# Altium PCB STM32F4_.PcbDoc
Units mil, origin at the board's own origin, x right, y up, seen from the top; angles counter-clockwise.
Board outline 2080 x 3020 mil, 2 copper layers (Top Layer, Bottom Layer); 41 components, 98 nets, 279 pads, 38 vias.
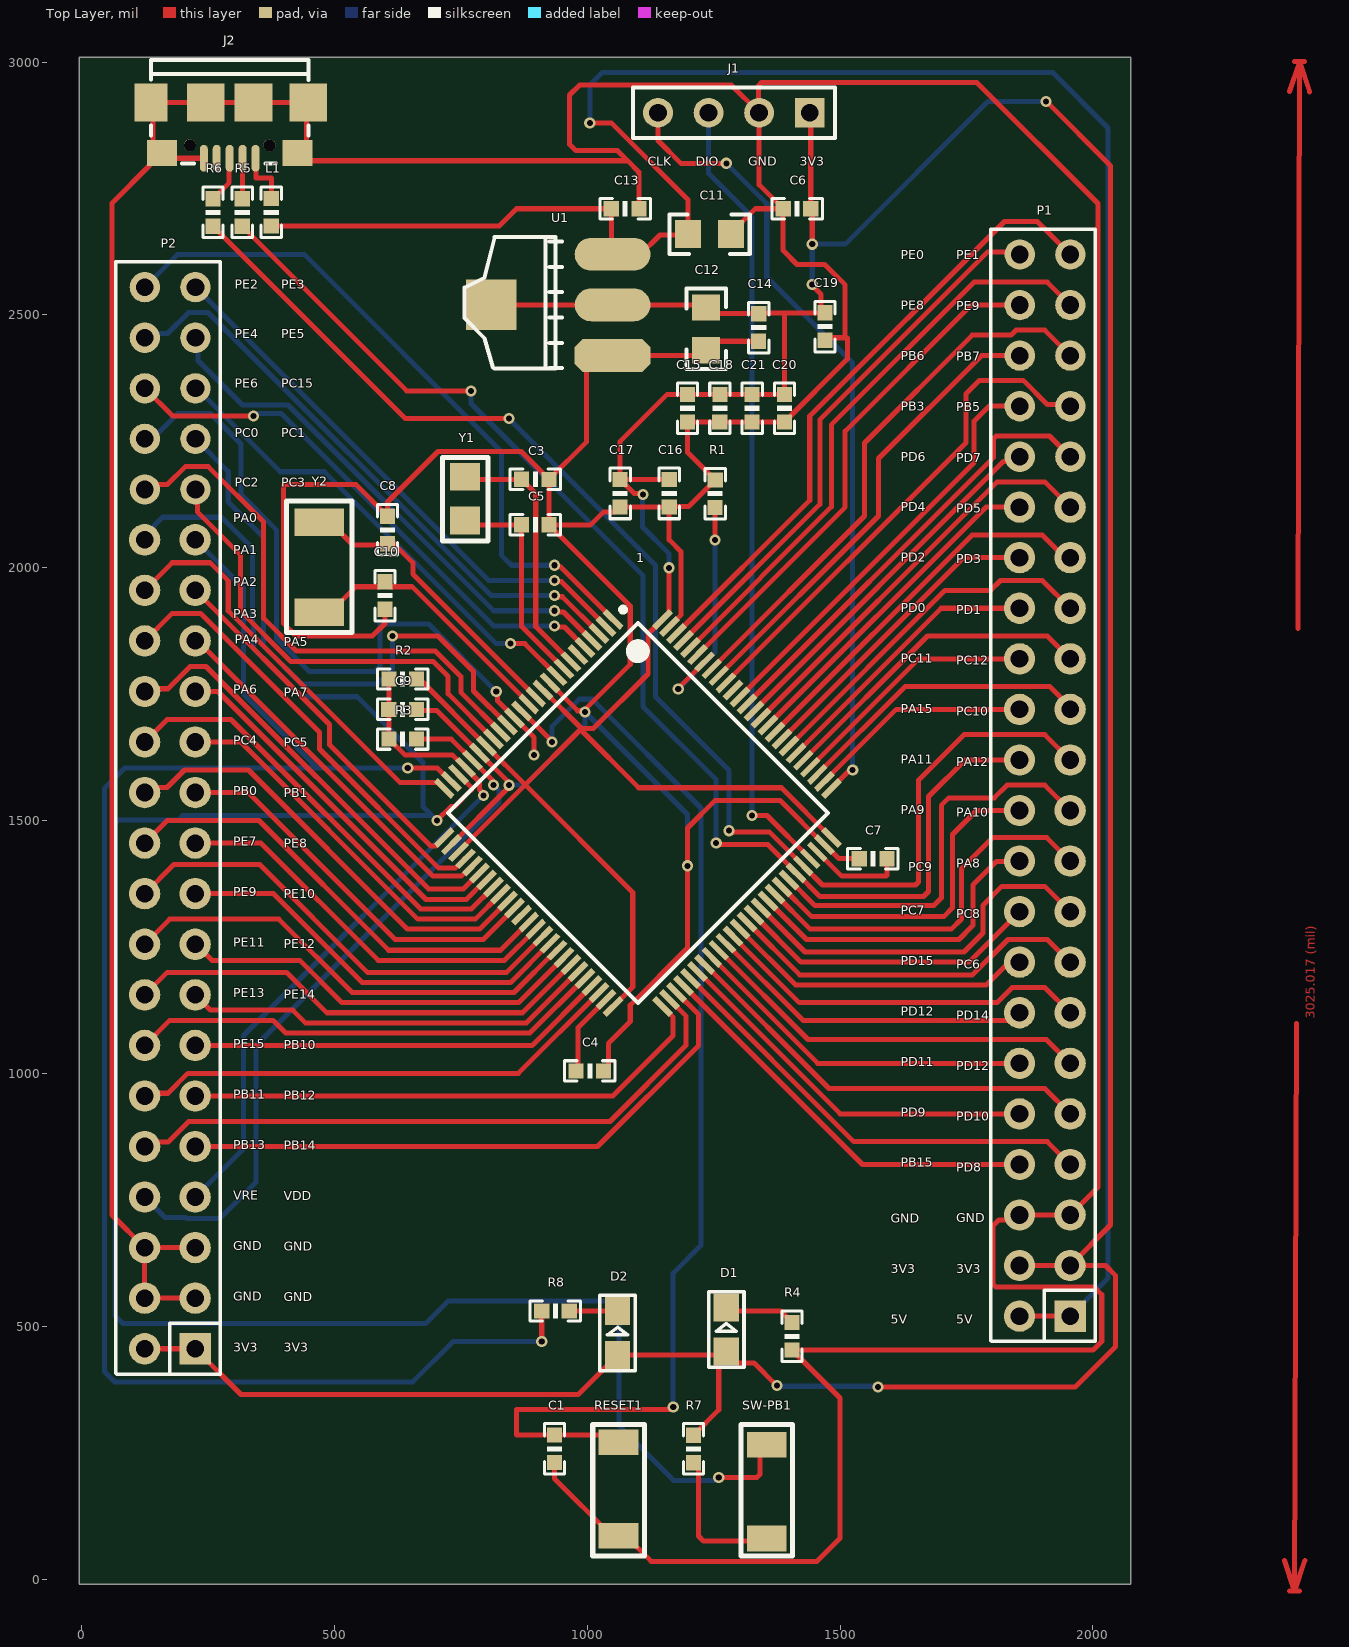
[diagram p0: Top Layer view]
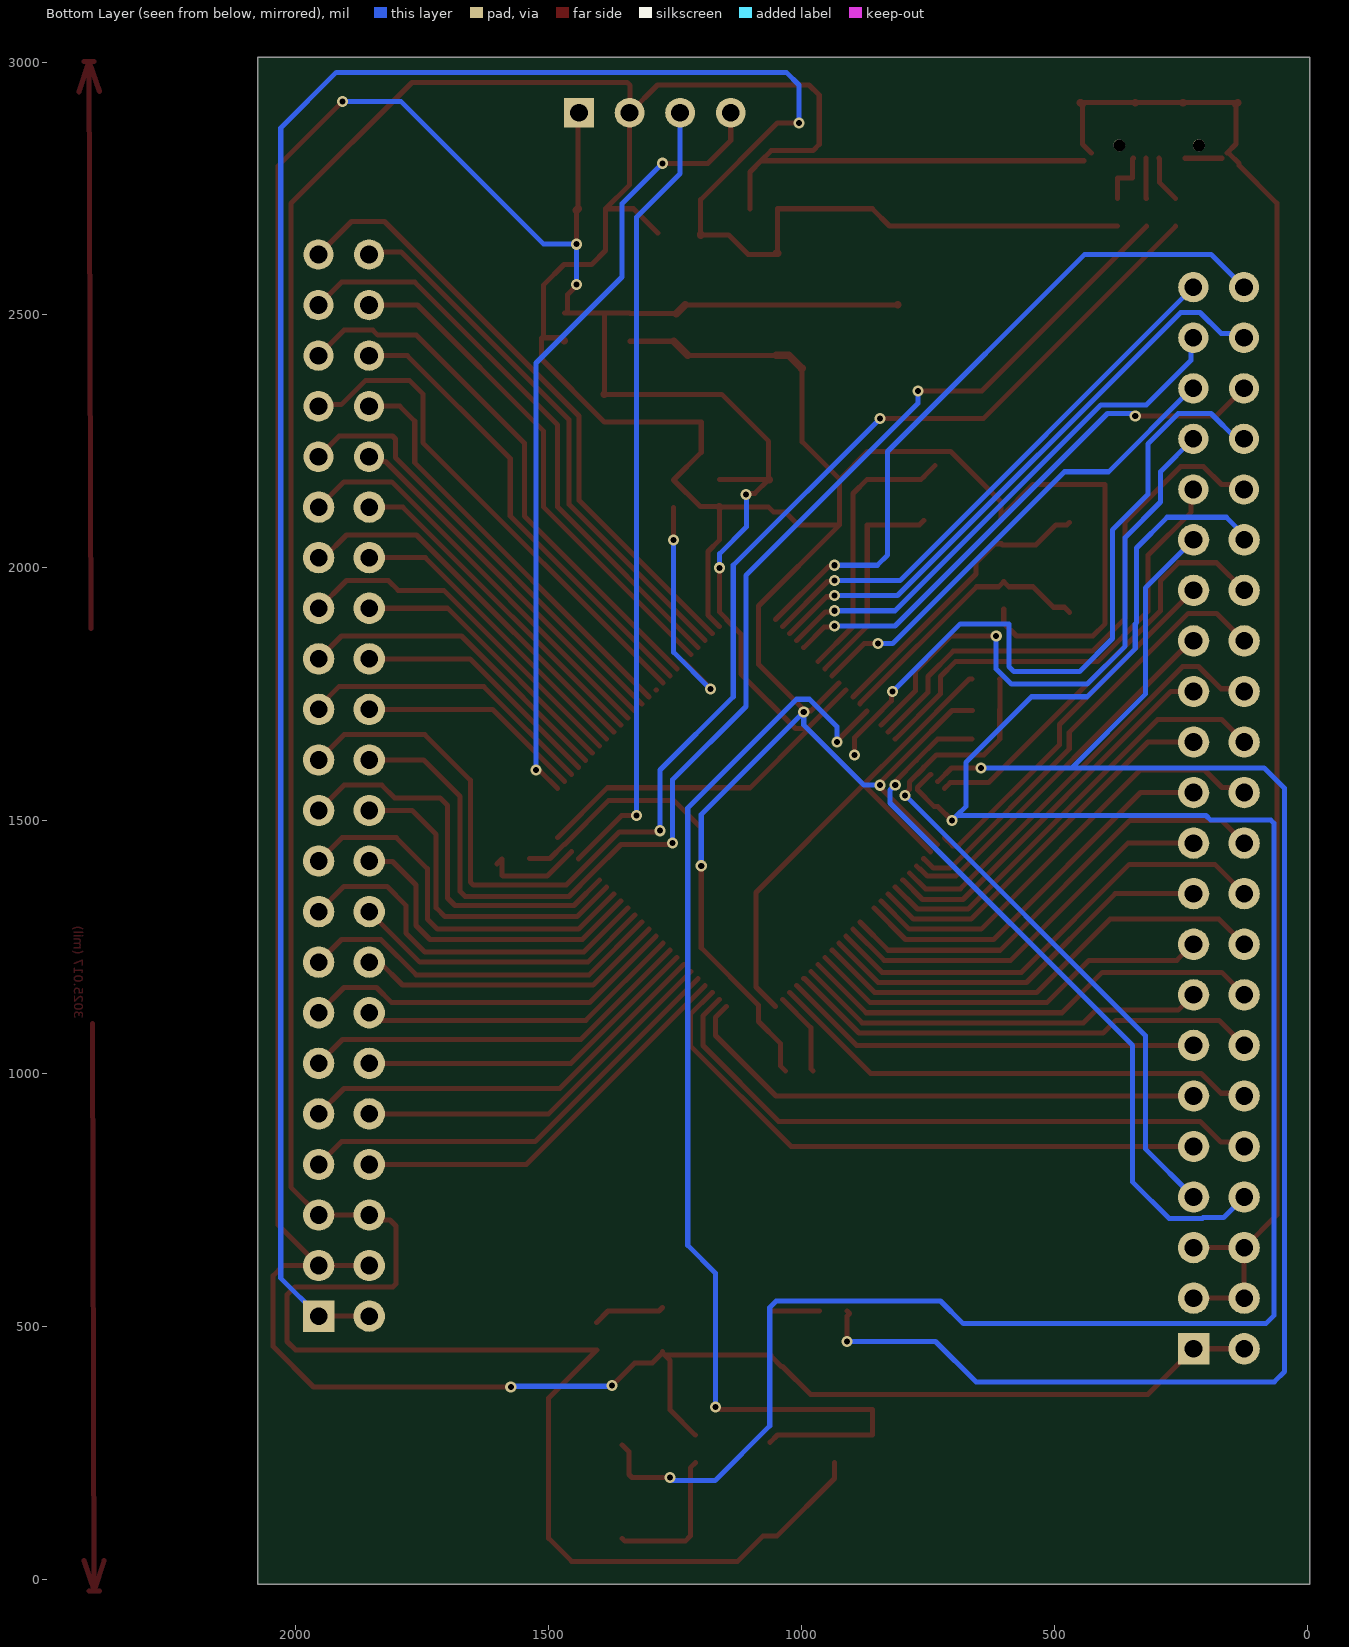
[diagram p1: Bottom Layer view, seen from below]

## Layer stack, top to bottom
Top Solder: solder mask 0.4, Solder Resist, Dk 3.5
Top Layer: signal copper 1.4
Dielectric 1: dielectric 12.6, FR-4, Dk 4.8
Bottom Layer: signal copper 1.4
Bottom Solder: solder mask 0.4, Solder Resist, Dk 3.5

## Board outline
-5,-10 2075,-10 2075,3010 -5,3010

## Design rules (kind name [scope] priority, off if disabled: settings)
Clearance Clearance_1 [All] p1: gap=6 ignorepadtopadclearanceinfootprint=TRUE
Clearance [All] p2: gap=10 ignorepadtopadclearanceinfootprint=FALSE except(0: Arc-Hole Track-Hole SMDPad-Hole THPad-Hole Via-Hole Fill-Hole Poly-Hole Region-Hole Text-Hole)
PolygonConnect [All] p1: thpad.connectstyle=Relief thpad.reliefconductorwidth=10 thpad.reliefentries=4 thpad.polygonreliefangle="90 Angle" thpad.airgapwidth=10 smdpad.connectstyle=Relief smdpad.reliefconductorwidth=10 smdpad.reliefentries=4 smdpad.polygonreliefangle="90 Angle" smdpad.airgapwidth=10 via.connectstyle=Direct via.reliefconductorwidth=10 via.reliefentries=4 via.polygonreliefangle="90 Angle" via.airgapwidth=10
RoutingVias [All] p1: holewidth=12 width=24 viastyle="Through Hole" minholewidth=12 minwidth=24 maxholewidth=12 maxwidth=24
SolderMaskExpansion [All] p1: expansion=4
Width Width_1 [InNetClass('PWR')] p1: maxlimit=10 minlimit=10 preferedwidth=10
Width [All] p2: maxlimit=10 minlimit=6 preferedwidth=6
30 further rules are at their usual default settings.

## Classes and differential pairs
net class pwr: 3V3 5V GND VBTA VDDA VREF+

## Components (designator, comment, footprint, x,y, rotation, side; value= is the part's Value field where it differs from the comment)
1 "STM32F407VET6" STM-LQFP100_V 1100,1515 r315 top
C1 "104" 0603P 934.94,257.5 r90 top
C3 "10P" 0603P 897.5,2174.94 r180 top
C4 "2.2uF" 0603P 1005,1005 r180 top
C5 "10P" 0603P 897.51,2085 r180 top
C6 "104" 0603P 1415,2710 r180 top
C7 "2.2uF" 0603P 1565,1424.52 r0 top
C8 "20pF" 0603P 605.06,2075 r270 top
C9 "2.2uF" 0603P 634.99,1720 r180 top
C10 "20pF" 0603P 600,1945 r90 top
C11 "Cap_" RC0805 1199.4,2660 r0 top
C12 "Cap_" RC0805 1235,2515 r270 top
C13 "104" 0603P 1075,2710 r180 top
C14 "104" 0603P 1338.94,2475 r90 top
C15 "104" 0603P 1198.32,2315.5 r90 top
C16 "104" 0603P 1162,2147 r90 top
C17 "104" 0603P 1065,2147 r90 top
C18 "104" 0603P 1262.19,2315.5 r90 top
C19 "104" 0603P 1470,2477 r90 top
C20 "104" 0603P 1389.94,2315.5 r90 top
C21 "104" 0603P 1326.06,2315.5 r90 top
D1 "LED1" SMDLED 1274.94,449.97 r90 top
D2 "LED2" SMDLED 1059.94,442.96 r90 top
J1 "Header 4" HDR1X4 1440,2900 r180 top
J2 "MiniUSB" micro_USB 343.94,2810 r0 top
L1 "500mA" 0603P 375,2703 r90 top
P1 "HEAD2*22" HEAD2*22 1955.43,519.58 r90 top
P2 "HEAD2*22" HEAD2*22 225,455 r90 top
R1 "10K" 0603P 1253,2146.83 r270 top
R2 "0R" 0603P 635,1780 r0 top
R3 "0R" 0603P 635,1661.15 r0 top
R4 "510R" 0603P 1405,480 r90 top
R5 "10K" 0603P 317.56,2703 r270 top
R6 "10K" 0603P 260,2703 r270 top
R7 "510R" 0603P 1209.94,257.5 r270 top
R8 "510R" 0603P 936.83,530 r0 top
RESET1 "KEY_M" SW-SPST 1062.04,270.54 r270 top
SW-PB1 "KEY_M" SW-SPST 1354.94,80.46 r90 top
U1 "AMS1117-3.3" AMS1117 1049.94,2419.97 r90 top
Y1 "32.768K" JZ3215-32K 758.32,2093.39 r90 top
Y2 "8MHz" JZ5032-8M 470,1912 r90 top

## Footprints (in the part's own frame and the unit in brackets; to place one, negate y for a bottom-side part, rotate by r counter-clockwise, add the part's x,y. Pads: shape width x height; smd on the part's side, far side on the other; paste and mask are expansions set on the pad)
0603P [mil]
  rect 30x30 smd: 1(-27,0) 2(27.5,-0.06)
  silkscreen extent -50,-20 50,20
AMS1117 [mil]
  oct 65x150 smd: 1(0.03,-0.06)
  oval 65x150 smd: 2(100.03,-0.06) 3(200.03,-0.06)
  rect 100x100 smd: 4(100.03,239.94)
  silkscreen extent -26,100 234,293
HDR1X4 [mm]
  rect 1.5x1.5 hole 0.9: 1(0,0)
  round 1.5 hole 0.9: 2(2.54,0) 3(5.08,0) 4(7.62,0)
  silkscreen extent -1.27,-1.27 8.89,1.27
HEAD2*22 [mil]
  rect 62x62 hole 35: 1(0.42,0.43)
  round 62 hole 35: 2(0.42,100.43) 3(100.42,0.43) 4(100.42,100.43) 5(200.42,0.43) 6(200.42,100.43) 7(300.42,0.43) 8(300.42,100.43) 9(400.42,0.43) 10(400.42,100.43) 11(500.42,0.43) 12(500.42,100.43) 13(600.42,0.43) 14(600.42,100.43) 15(700.42,0.43) 16(700.42,100.43) 17(800.42,0.43) 18(800.42,100.43) 19(900.42,0.43) 20(900.42,100.43) 21(1000.42,0.43) 22(1000.42,100.43) 23(1100.42,0.43) 24(1100.42,100.43) 25(1200.42,0.43) 26(1200.42,100.43) 27(1300.42,0.43) 28(1300.42,100.43) 29(1400.42,0.43) 30(1400.42,100.43) 31(1500.42,0.43) 32(1500.42,100.43) 33(1600.42,0.43) 34(1600.42,100.43)
  round 60 hole 35: 35(1700,0) 36(1700,100) 37(1800,0) 38(1800,100) 39(1900,0) 40(1900,100) 41(2000,0) 42(2000,100) 43(2100,0) 44(2100,100)
  silkscreen extent -50,-50 2150,157
JZ3215-32K [mm]
  rect 1.4x1.5 smd paste-0.06 mask+0.05: 1(0,0) 2(2.2,0)
  silkscreen extent -1.02,-1.14 3.17,1.14
JZ5032-8M [mm]
  rect 1.4x2.5 smd: 1(0,0) 2(4.521,0)
  silkscreen extent -1.02,-1.65 5.59,1.65
micro_USB [mm]
  oval 0.4x1.35 smd: 1(0,0) 2(-0.65,0) 3(-1.3,0) 4(-1.95,0) 5(-2.6,0)
  rect 1.651x1.9 smd: 6(-5.25,2.794)
  rect 1.5x1.3 smd: 6(-4.699,0.254) 9(2.099,0.254)
  rect 1.9x1.9 smd: 7(-2.5,2.794) 8(-0.1,2.794) 9(2.65,2.794)
  round 0.6 hole 0.6: ""(-3.3,0.644) ""(0.7,0.644)
  silkscreen extent -5.25,-0.25 2.65,4.94
RC0805 [mil]
  rect 52x56 smd: 1(0,0) 2(85,0)
  silkscreen extent -37,-39 122,39
SMDLED [mm]
  rect 1.4x1.27 smd: 1(0.001,-0.002) 2(2.211,-0.002)
  silkscreen extent -0.8,-0.89 3.01,0.89
STM-LQFP100_V [mm] "Thin QFP, 100-Leads, Body 14x14mm, Pitch 0.5mm, ST Recommended"
  rect 1.2x0.3 smd: 1(-7.75,6) 2(-7.75,5.5) 3(-7.75,5) 4(-7.75,4.5) 5(-7.75,4) 6(-7.75,3.5) 7(-7.75,3) 8(-7.75,2.5) 9(-7.75,2) 10(-7.75,1.5) 11(-7.75,1) 12(-7.75,0.5) 13(-7.75,0) 14(-7.75,-0.5) 15(-7.75,-1) 16(-7.75,-1.5) 17(-7.75,-2) 18(-7.75,-2.5) 19(-7.75,-3) 20(-7.75,-3.5) 21(-7.75,-4) 22(-7.75,-4.5) 23(-7.75,-5) 24(-7.75,-5.5) 25(-7.75,-6) 51(7.75,-6) 52(7.75,-5.5) 53(7.75,-5) 54(7.75,-4.5) 55(7.75,-4) 56(7.75,-3.5) 57(7.75,-3) 58(7.75,-2.5) 59(7.75,-2) 60(7.75,-1.5) 61(7.75,-1) 62(7.75,-0.5) 63(7.75,0) 64(7.75,0.5) 65(7.75,1) 66(7.75,1.5) 67(7.75,2) 68(7.75,2.5) 69(7.75,3) 70(7.75,3.5) 71(7.75,4) 72(7.75,4.5) 73(7.75,5) 74(7.75,5.5) 75(7.75,6)
  rect 0.3x1.2 smd: 26(-6,-7.75) 27(-5.5,-7.75) 28(-5,-7.75) 29(-4.5,-7.75) 30(-4,-7.75) 31(-3.5,-7.75) 32(-3,-7.75) 33(-2.5,-7.75) 34(-2,-7.75) 35(-1.5,-7.75) 36(-1,-7.75) 37(-0.5,-7.75) 38(0,-7.75) 39(0.5,-7.75) 40(1,-7.75) 41(1.5,-7.75) 42(2,-7.75) 43(2.5,-7.75) 44(3,-7.75) 45(3.5,-7.75) 46(4,-7.75) 47(4.5,-7.75) 48(5,-7.75) 49(5.5,-7.75) 50(6,-7.75) 76(6,7.75) 77(5.5,7.75) 78(5,7.75) 79(4.5,7.75) 80(4,7.75) 81(3.5,7.75) 82(3,7.75) 83(2.5,7.75) 84(2,7.75) 85(1.5,7.75) 86(1,7.75) 87(0.5,7.75) 88(0,7.75) 89(-0.5,7.75) 90(-1,7.75) 91(-1.5,7.75) 92(-2,7.75) 93(-2.5,7.75) 94(-3,7.75) 95(-3.5,7.75) 96(-4,7.75) 97(-4.5,7.75) 98(-5,7.75) 99(-5.5,7.75) 100(-6,7.75)
  silkscreen extent -7.87,-6.75 6.75,6.82, body extent -7,-7 7,7, height 1.6
SW-SPST [mm]
  rect 1.3x2 smd paste+0 mask+0.2: 1(0,0) 2(4.7,0)
  silkscreen extent -0.89,-1.3 5.72,1.3

## Part data
C1 C3 C4 C5 C6 C7 C8 C9 C10 C13 C14 C15 C16 C17 C18 C19 C20 C21: library part C
D1: library part LED2, "Typical RED, GREEN, YELLOW, AMBER GaAs LED", PackageDocument=Feb-2002, LatestRevisionDate=17-Jul-2002, LatestRevisionNote="Re-released for DXP Platform.", PackageReference=3.2X1.6X1.1, Published=8-Jun-2000, Publisher="Altium Limited"
D2: "Typical RED, GREEN, YELLOW, AMBER GaAs LED", PackageDocument=Feb-2002, LatestRevisionDate=17-Jul-2002, LatestRevisionNote="Re-released for DXP Platform.", PackageReference=3.2X1.6X1.1, Published=8-Jun-2000, Publisher="Altium Limited"
J1: "Header, 4-Pin", LatestRevisionDate=17-Jul-2002, LatestRevisionNote="Re-released for DXP Platform.", Publisher="Altium Limited"
L1: library part L
R1 R2 R3 R4 R5 R6 R7 R8: library part R
U1: library part AMS1117
Y1 Y2: library part XTAL, "Crystal Oscillator", LatestRevisionDate=17-Jul-2002, LatestRevisionNote="Re-released for DXP Platform.", Published=8-Jun-2000, Publisher="Altium Limited"

## Via types
v1: diameter 22, hole 12, Top Layer to Bottom Layer, tented both sides, 38 vias

## Nets (pads, with @x,y where several pads share a name; then routed paths per layer and width w, separated by ;. In a path a pad name is that pad's centre, name@x,y a point inside that pad or via, vN(x,y) a via of type N, cw(c..) or ccw(c..) an arc to the next point about the centre after c; other vN are vias at no path point)
3V3: 1.11 1.19 1.28 1.50 1.75 1.100 C6.1 C12.1 C14.2 C15.2 C16.2 C17.2 C18.2 C19.2 C20.2 C21.2 D1.1 D2.1 J1.1 P1.3 P1.4 P2.1 P2.2 R2.2 R7.1 U1.2 U1.4 | length 9815.8
  Top Layer w10: P2.2 P2.1 315,365 982.01,365 1037.44,420.43 1040,420.43 1060,440.43 D2.1 D1.1@1270.55,442.99 ; R2.2 668.03,1779.94 1.19 877.29,1570.68 ; 1.28 877.29,1570.68 ; U1.4 U1.2 C12.1@1230,2520 ; 1.11 988.64,1682.03 ; 1.50 1090,1170.93 1090,1357.97 877.29,1570.68 ; C17.2@1064.4,2173.83 1065.73,2173.83 1092.27,2147.3 1107.7,2147.3 v1(1110,2145) ; v1(1162,2000) 1162,1912.35 1148.72,1899.06 1.100 1120,1869.07 1120,1790 1012.03,1682.03 988.64,1682.03 ; C16.2 C17.2 1065.06,2250.06 1158,2343 C15.2 C18.2 C21.2 C20.2 1390,2503.5 ; R7.1 1260.07,334.64 1260.07,432.51 D1.1@1270.55,442.99 ; C12.1@1247.5,2502.5 C14.2 ; D1.1 D1.1@1275,447.44 ; C14.2@1340,2503.5 1390,2503.5 ; v1(1375,382.5) 1330.06,427.44 1295,427.44 D1.1@1275,447.44 ; C6.1 J1.1@1442,2898 ; v1@1445,2558.11 1462.56,2540.54 C19.2@1462.56,2510 ; v1(1445,2640) C6.1@1445,2707 ; C19.2@1469.06,2503.5 1390,2503.5 ; 1.75 1384.07,1565 1101.61,1565 986.61,1680 ; v1(1575,380) 1965,380 2045,460 2045,600 2025,620 P1.3 ; P1.4 P1.3 ; v1(1907.5,2922.5) 2035,2795 2035,700 P1.3 ; 877.29,1570.68 986.61,1680 ; 986.61,1680 988.64,1682.03 ; D1.1@1270.55,442.99 D1.1@1275,447.44
  Top Layer w15: C17.2@1064.4,2173.83 C17.2 ; C12.1@1230,2520 C12.1 C12.1@1247.5,2502.5 ; J1.1 J1.1@1442,2898 ; C6.1 C6.1@1445,2707 ; v1@1445,2558.11 v1(1445,2560)
  Bottom Layer w10: v1(1110,2145) 1109.27,2144.27 1109.27,2080.73 1162,2028 ; v1(1162,2000) 1162,2025 ; v1(1375,382.5) 1376.25,381.25 1573.75,381.25 v1(1575,380) ; v1(1445,2560) v1(1445,2640) 1510,2640 1792.5,2922.5 v1(1907.5,2922.5)
5V: C11.1 C13.2 L1.1 P1.1 P1.2 U1.3 | length 4906.2
  Top Layer w10: L1.1 826,2676 860.06,2710.06 C13.2 U1.3@1047.5,2622.5 ; v1(1005,2880) 1047.5,2880 1199.4,2728.1 C11.1 ; U1.3 1106.03,2620 1144.03,2658 C11.1@1199.4,2658 ; P1.2 P1.1
  Top Layer w15: U1.3@1047.5,2622.5 U1.3@1050,2622.5 ; C11.1@1199.4,2658 C11.1
  Bottom Layer w10: v1(1005,2880) 1005,2955 1030,2980 1920,2980 2030,2870 2030,595 P1.1
BOOT0: 1.94 R1.2 | length 465.4
  Top Layer w10: v1(1180,1760) 1180,1762.03 1.94 ; v1(1252.94,2055) R1.2
  Bottom Layer w10: v1(1180,1760) 1252.94,1832.94 v1(1252.94,2055)
GND: 1.10 1.20 1.27 1.74 1.99 C1.1 C3.1 C4.1 C5.1 C6.2 C7.1 C8.1 C9.1 C10.1 C11.2 C12.2 C13.1 C14.1 C15.1 C16.1 C17.1 C18.1 C19.1 C20.1 C21.1 J1.2 J2.5 J2.6 J2.7 J2.8 J2.9 P1.5 P1.6 P2.3 P2.4 P2.5 P2.6 R1.1 R4.1 RESET1.2 U1.1 | length 15979.1
  Top Layer w10: J2.6@137.24,2920 J2.7 J2.8 J2.9@448.27,2920 ; J2.6@140.85,2916.4 140.85,2838.09 158.94,2820 155,2820 134.41,2799.41 134.41,2795.47 60,2721.06 60,720 P2.6 ; J2.6@168.94,2810 J2.5 ; P2.3 P2.4 P2.6 ; P2.5 P2.6 ; J2.9@426.57,2820 444.67,2838.09 J2.9@444.67,2916.4 ; J2.9@441.57,2805 1080,2805 ; C10.1 600,1890 575,1865 424.07,1865 399.57,1889.49 399.57,2165 542.06,2165 C8.1 ; C8.1@605.06,2093.45 C8.1 ; C9.1@662,1717.58 702.54,1717.58 1.20 849.45,1570.68 846.89,1568.11 836.41,1557.64 1.27 ; 1.10 981.22,1717.3 993.31,1717.3 1085,1808.99 1085,1924.51 C5.1 ; C1.1 934.94,198.83 1048.26,85.5 RESET1.2 1075.82,85.5 1126.32,35 1454.54,35 1500,80.46 1500,358 R4.1 2000.53,453 2017.53,470 2017.53,562.47 2002,578 1807.86,578 1802,583.86 1802,698 1814.05,710.05 1845.05,710.05 P1.6 P1.5 2010,775 2010,2720.43 1770.43,2960 1344.79,2960 1338.94,2954.14 J1.2@1338.94,2901.06 ; U1.1@998.75,2395 998.75,2249.19 C3.1 ; C4.1 1042,1015 1042,1059.58 1085,1102.58 1085,1135 1198.32,1248.32 v1(1198.32,1410.6) 1198.32,1485.38 1252.94,1540 1381.23,1540 1.74 1470.15,1452.36 1497.51,1425 C7.1@1538,1425 ; U1.1 C12.2@1225,2420 ; C13.1 1102,2783 1080,2805 ; 1.99 1185,1906.23 1185,2032.23 1162,2055.23 C16.1 C17.1 1055,2110 1031.82,2110 1006.82,2085 C5.1 ; C16.1@1162.83,2120.83 1200,2120.83 R1.1 1198.32,2228.52 C15.1 C18.1 C21.1 C20.1 1514.28,2412.85 1514.28,2454.28 ; C12.2@1253,2448 C14.1 ; C11.2@1284.4,2662 1332.46,2710.06 C6.2 ; C19.1 1475,2455 1510,2455 1510,2559.57 1469.57,2600 1415,2600 1387.5,2627.5 C6.2 ; C8.1 605.06,2130.06 705,2230 869.44,2230 C3.1 ; C5.1 C3.1 ; 1080,2805 1060,2825 977.5,2825 965,2837.5 965,2935 985,2955 1285,2955 J1.2@1338.94,2901.06 ; J1.2@1338.94,2901.06 1339.4,2900.6 1339.4,2900 J1.2 1340,2757.56 C6.2
  Top Layer w15: J2.6@137.24,2920 J2.6@140.85,2916.4 ; J2.9@444.67,2916.4 J2.9@448.27,2920 ; U1.1@998.75,2395 1000,2395 1025,2420 U1.1 ; C16.1 C16.1@1162.83,2120.83 ; C12.2@1225,2420 C12.2 C12.2@1253,2448 ; C19.1@1469,2449 C19.1
  Bottom Layer w10: v1(845,1570) 876.61,1570 995.6,1688.99 v1(995.6,1715) 1198.32,1512.29 v1(1198.32,1410.6)
Net1_12: 1.12 C8.2 Y2.2 | length 586.3
  Top Layer w10: Y2.2 475,2085 496.65,2085 536.65,2045 602.5,2045 C8.2 617.5,2047.5 655,2010 655,1987.84 1.12
Net1_13: 1.13 C10.2 Y2.1 | length 540.1
  Top Layer w10: Y2.1 480,1922 501.65,1922 542.15,1962.5 590.06,1962.5 C10.2 610.06,1962.5 653.61,1962.5 884.25,1731.86 1.13
Net1_49: 1.49 C4.2 | length 165.9
  Top Layer w10: C4.2 981.68,1009.25 981.68,1090.46 1.49
Net1_73: 1.73 C7.2 | length 205.1
  Top Layer w10: 1.73 1503.39,1390 1590.54,1390 1592.5,1391.96 C7.2 C7.2@1602.5,1414.46
NetD1_2: D1.2 R4.2 | length 142.3
  Top Layer w10: D1.2 1282.01,530 1382.56,530 R4.2
NetD2_2: D2.2 R8.2 | length 95.7
  Top Layer w10: R8.2 964.4,530 D2.2
NetJ2_1: J2.1 L1.2 | length 110
  Top Layer w10: J2.1 345.04,2808.9 345.04,2770.86 375.06,2770.86 L1.2
NetJ2_2: J2.2 R5.1 | length 80.3
  Top Layer w10: R5.1 318.35,2730.78 J2.2
NetJ2_3: J2.3 R6.1 | length 93.6
  Top Layer w10: R6.1 291.66,2761.66 291.66,2808.9 J2.3
NetR7_2: R7.2 SW-PB1.1 | length 290.5
  Top Layer w10: R7.2 1219.87,220 1219.87,85.13 1230,75 1349.48,75 SW-PB1.1
PA0/WK_UP: 1.23 P2.34 SW-PB1.2 | length 4414
  Top Layer w10: v1(702.54,1500) 730.14,1527.6 737.6,1527.6 770.81,1560.81 770.81,1565.81 1.23 1.23@743.77,1591.56 ; v1(1260,200.86) 1335.33,200.86 1341.19,206.72 1341.19,251.76 SW-PB1.2
  Bottom Layer w10: P2.34 124.57,2064.57 160,2100 276.64,2100 337.5,2039.14 337.5,1891.64 340,1889.14 340,1840 435,1745 545,1745 675,1615 675,1527.54 692.54,1510 ; v1(702.54,1500) 692.54,1510 ; v1(1260,200.86) 1254.14,195 1170.86,195 1062.84,303.02 1062.84,537.16 1050,550 725,550 680,505 81.72,505 65.86,520.86 65.86,1495 71.72,1500.86 190.86,1500.86 200,1510 692.54,1510
PA1: 1.24 P2.33 R8.1 | length 3389.6
  Top Layer w10: v1(645,1604.2) 703.3,1604.2 729.85,1577.64 1.24 ; R8.1 904.83,525 910,519.83 v1(910,470)
  Bottom Layer w10: P2.33 320,1960 320,1750 465.8,1604.2 ; v1(645,1604.2) 465.8,1604.2 ; v1(910,470) 735,470 655,390 65.05,390 45,410.05 45,1564.14 85.05,1604.2 465.8,1604.2
PA2: 1.25 P2.32 | length 834.7
  Top Layer w10: P2.32 179.15,2010 254.14,2010 290,1974.14 290,1915.07 630.07,1575 705.93,1575 1.25
PA3: 1.26 P2.31 | length 735.7
  Top Layer w10: P2.31@228.07,1955.43 P2.31 490,1690 490,1650 690,1450 700.93,1450 1.26
PA4: 1.29 P2.30 | length 892.8
  Top Layer w10: P2.30 179.15,1910 235,1910 470.5,1674.5 470.5,1641.5 706,1406 739.17,1406 757.69,1424.52 1.29
PA5: 1.30 P2.29 | length 749.6
  Top Layer w10: P2.29 229.57,1855.43 695,1390 751.01,1390 764.9,1403.89 766.18,1403.89 1.30
PA6: 1.31 P2.28 | length 878.2
  Top Layer w10: P2.28 129.97,1760.82 170.57,1760.82 214.75,1805 246,1805 686,1365 755,1365 786.68,1396.68 1.31
PA7: 1.32 P2.27 | length 762.5
  Top Layer w10: P2.27 269.57,1755.43 680.86,1344.14 760.83,1344.14 799.45,1382.77 1.32
PA8: 1.67 P1.19 | length 764.9
  Top Layer w10: 1.67 1441.03,1285.33 1720,1285.33 1740,1305.33 1740,1405 1801.28,1466.28 1908.72,1466.28 P1.19
PA9/TXD1: 1.68 P1.22 | length 666
  Top Layer w10: 1.68 1444.19,1310 1705,1310 1722.5,1327.5 1722.5,1472.5 1770,1520 P1.22
PA10/RXD1: 1.69 P1.21 | length 803.5
  Top Layer w10: 1.69 1450,1332.03 1685.47,1332.03 1700.23,1346.8 1700.23,1530.23 1715,1545 1805,1545 1830,1570 1905,1570 P1.21
PA11/USB_DM: 1.70 P1.24 R5.2 | length 2548.3
  Top Layer w10: R5.2 643,2350 v1(770,2350) ; v1(1255,1455.43) 1257.72,1452.7 1357.17,1452.7 1.70 1459.87,1350 1665.07,1350 1675.04,1359.96 1675.04,1547.67 1747.36,1620 P1.24
  Bottom Layer w10: v1(770,2350) 770,2325 1110,1985 1110,1725.86 1255,1580.86 v1(1255,1455.43)
PA12/USB_DP: 1.71 P1.23 R6.2 | length 2727.1
  Top Layer w10: R6.2 640.44,2295 v1(845,2295) ; v1(1280,1480) 1282.3,1477.7 1360.01,1477.7 1.71 1465.21,1372.5 1649.14,1372.5 1655,1378.36 1655,1580 1745,1670 1905,1670 P1.23
  Bottom Layer w10: v1(845,2295) 1135,2005 1135,1745 1280,1600 v1(1280,1480) ; P1.23@1949.6,1614.6 P1.23
PA13_SWDIO: 1.72 J1.3 | length 1576
  Top Layer w10: v1(1326.13,1510) 1355.55,1510 1.72
  Bottom Layer w10: J1.3 1240,2780 1326.13,2693.87 v1(1326.13,1510)
PA14_SWCLK: 1.76 J1.4 | length 1564.4
  Top Layer w10: J1.4 1140,2845 1185,2800 v1@1270,2800 ; 1.76 1516.77,1597.7 1522.7,1597.7 v1(1525,1600)
  Bottom Layer w10: v1(1275,2800) 1355,2720 1355,2575 1525,2405 v1(1525,1600)
PA15/TDI: 1.77 P1.26 | length 445.1
  Top Layer w10: 1.77 1611.23,1720 P1.26
PB0: 1.35 P2.24 | length 889.8
  Top Layer w10: P2.24 134.52,1565.37 168.6,1565.37 203.22,1600 330,1600 644.67,1285.33 786.81,1285.33 1.35
PB1: 1.36 P2.23 | length 777.9
  Top Layer w10: P2.23 329.57,1555.43 620,1265 794.32,1265 1.36
PB2/BOOT1: 1.37
PB3/TDO: 1.89 P1.38 | length 839.9
  Top Layer w10: 1.89 1765,2207.84 1765,2290 1794.57,2319.57 P1.38
PB4: 1.90 | length 1.3
  Top Layer w10: 1.90@1286.63,1758.59 1.90
PB5: 1.91 P1.37 | length 1007
  Top Layer w10: 1.91 1749,2247.52 1749,2344 1775.86,2370.86 1862.12,2370.86 1910.43,2322.56 1952.44,2322.56 P1.37
PB6: 1.92 P1.40 | length 924.2
  Top Layer w10: 1.92 1576.06,2102.42 1576.06,2216.06 1779.57,2419.57 P1.40
PB7: 1.93 P1.39 | length 1092.2
  Top Layer w10: 1.93 1548.29,2102.49 1548.29,2246.94 1761.36,2460 1837.87,2460 1847.87,2470 1905,2470 P1.39
PB8: 1.95 P1.42 | length 1011.4
  Top Layer w10: 1.95 1510,2119.87 1510,2270 1759.57,2519.57 P1.42
PB9: 1.96 P1.41 | length 1164.3
  Top Layer w10: 1.96 1482.78,2120.49 1482.78,2282.78 1765,2565 1910,2565 P1.41
PB10: 1.47 P2.13 | length 834.1
  Top Layer w10: P2.13 890.97,1055.42 1.47
PB11: 1.48 P2.12 | length 983.6
  Top Layer w10: P2.12 129.97,960.82 170.57,960.82 209.94,1000.19 863.58,1000.19 1.48
PB12: 1.51 P2.11 | length 1061
  Top Layer w10: P2.11 1050.43,955.42 1170,1075 1170,1110.93 1.51
PB13: 1.52 P2.10 | length 1257.6
  Top Layer w10: P2.10 133.11,863.96 170.57,863.96 211.61,905 1045,905 1195,1055 1195,1113.77 1.52
PB14: 1.53 P2.9 | length 1201
  Top Layer w10: P2.9 1020.43,855.42 1219.87,1054.87 1219.87,1116.74 1.53
PB15: 1.54 P1.8 | length 811.1
  Top Layer w10: 1.54 1544.45,820 P1.8
PC0: 1.15 P2.38 | length 1411.4
  Top Layer w10: v1(820,1755) 822.3,1752.7 822.3,1737.03 1.15 895,1664.32 v1(895,1630)
  Bottom Layer w10: P2.38 140,2255 190,2305 255,2305 315,2245 315,2145 385,2075 385,1860 450,1795 580,1795 590,1805 590,1889.14 685.86,1889.14 v1(820,1755)
PC1: 1.16 P2.37 | length 1152.4
  Top Layer w10: v1(615,1865) 705,1865 775,1795 775,1756.48 1.16
  Bottom Layer w10: P2.37 290,2190 290,2130 360,2060 360,1845 435,1770 585,1770 615,1800 v1(615,1865)
PC2: 1.17 P2.36 | length 1069.6
  Top Layer w10: P2.36 134.57,2164.57 169.57,2164.57 205,2200 250.44,2200 360,2090.44 360,1900 425,1835 700,1835 750,1785 750,1753.64 1.17
PC3: 1.18 P2.35 | length 903
  Top Layer w10: P2.35 229.4,2150.6 229.4,2110 314.57,2024.82 314.57,1913.89 414.2,1814.27 695.73,1814.27 725,1785 725,1750.81 1.18
PC4: 1.33 P2.26 | length 882
  Top Layer w10: P2.26 169.15,1700 295.44,1700 670.44,1325 770.81,1325 1.33
PC5: 1.34 P2.25 | length 769.8
  Top Layer w10: P2.25 314.57,1655.43 665,1305 778.64,1305 1.34
PC6: 1.63 P1.15 | length 730.1
  Top Layer w10: 1.63 1420,1195 1762.11,1195 1832.11,1265 1910,1265 P1.15
PC7: 1.64 P1.18 | length 605.3
  Top Layer w10: 1.64 1422.84,1220 1755,1220 P1.18
PC8: 1.65 P1.17 | length 754.3
  Top Layer w10: 1.65 1430.68,1240 1745,1240 1782.5,1277.5 1782.5,1332.5 1820,1370 1905,1370 P1.17
PC9: 1.66 P1.20 | length 640
  Top Layer w10: 1.66 1433.52,1265 1735,1265 1762.5,1292.5 1762.5,1372.5 1809,1419 1854,1419 P1.20
PC10: 1.78 P1.25 | length 593.5
  Top Layer w10: 1.78 1628.39,1765 1915,1765 1955,1725 P1.25
PC11: 1.79 P1.28 | length 502.8
  Top Layer w10: 1.79 1655.55,1820 P1.28
PC12: 1.80 P1.27 | length 648.3
  Top Layer w10: 1.80 1672.71,1865 1910,1865 P1.27
PC13: 1.7 C3.2 Y1.2 | length 546.9
  Top Layer w10: Y1.2@735.76,2202.56 Y1.2 763.32,2175 C3.2 898.17,2146.83 898.17,1883.86 1.7
PC14: 1.8 C5.2 Y1.1 | length 434.6
  Top Layer w10: Y1.1 766.64,2085.06 C5.2 870.01,1884.18 1.8
PC15: 1.9 P2.39 | length 950.4
  Top Layer w10: v1(848.52,1850) 876.36,1850 1.9
  Bottom Layer w10: P2.39 227.63,2355 392.63,2190 480,2190 820,1850 v1(848.52,1850)
PD0: 1.81 P1.30 | length 560.6
  Top Layer w10: 1.81 1699.87,1920 P1.30
PD1: 1.82 P1.29 | length 714.3
  Top Layer w10: 1.82 1707.46,1955.43 1797.71,1955.43 1817.29,1975 1900,1975 P1.29
PD2: 1.83 P1.32 | length 618.3
  Top Layer w10: 1.83 1744.19,2020 P1.32
PD3: 1.84 P1.31 | length 763.7
  Top Layer w10: 1.84 1761.36,2065 1900,2065 1945,2020 P1.31
PD4: 1.85 P1.34 | length 676
  Top Layer w10: 1.85 1788.52,2120 P1.34
PD5: 1.86 P1.33 | length 825.6
  Top Layer w10: 1.86 1810.68,2170 1905,2170 P1.33
PD6: 1.87 P1.36 | length 734
  Top Layer w10: 1.87 1822.85,2210.01 1845.86,2210.01 P1.36
PD7: 1.88 P1.35 | length 897.7
  Top Layer w10: 1.88 1802.9,2217.9 1802.9,2254.76 1808.76,2260.61 1914.39,2260.61 P1.35
PD8: 1.55 P1.7 | length 903
  Top Layer w10: 1.55 1527.29,865 1910,865 P1.7
PD9: 1.56 P1.10 | length 753.4
  Top Layer w10: 1.56 1500.13,920 P1.10
PD10: 1.57 P1.9 | length 845.3
  Top Layer w10: 1.57 1477.97,970 1905,970 P1.9
PD11: 1.58 P1.12 | length 695.7
  Top Layer w10: 1.58 1455.81,1020 P1.12
PD12: 1.59 P1.11 | length 787.5
  Top Layer w10: 1.59 1436.41,1067.23 1907.77,1067.23 P1.11
PD13: 1.60 P1.14 | length 650.4
  Top Layer w10: 1.60 1426.48,1105 1840,1105 P1.14
PD14: 1.61 P1.13 | length 754.7
  Top Layer w10: 1.61 1419.32,1140 1810.54,1140 1840.54,1170 1905,1170 P1.13
PD15: 1.62 P1.16 | length 617.5
  Top Layer w10: 1.62 1412.16,1175 1789,1175 1834,1220 P1.16
PE0: 1.97 P1.44 | length 1083.8
  Top Layer w10: 1.97 1460,2125.55 1460,2293 1792,2625 1850,2625 P1.44
PE1: 1.98 P1.43 | length 1241.2
  Top Layer w10: 1.98 1440,2133.39 1440,2300 1825,2685 1890,2685 P1.43
PE2: 1.1 P2.44 | length 1372.4
  Top Layer w10: v1(935,2005) 937.3,2002.7 946.36,2002.7 1.1
  Bottom Layer w10: P2.44 190,2620 440,2620 830,2230 830,2025 850,2005 v1(935,2005)
PE3: 1.2 P2.43 | length 1090.4
  Top Layer w10: v1(935,1975) 937.3,1972.7 948.52,1972.7 1.2
  Bottom Layer w10: P2.43 805,1975 v1(935,1975)
PE4: 1.3 P2.42 | length 1182.2
  Top Layer w10: v1(935,1945) 937.3,1942.7 950.68,1942.7 1.3
  Bottom Layer w10: P2.42 133.24,2463.24 170,2463.24 211.76,2505 250,2505 810,1945 v1(935,1945)
PE5: 1.4 P2.41 | length 1067.8
  Top Layer w10: P2.41@225,2443.27 P2.41 ; v1(935,1915) 937.3,1912.7 952.85,1912.7 1.4
  Bottom Layer w10: P2.41 230,2450 230,2410 318,2322 408,2322 815,1915 v1(935,1915)
PE6: 1.5 P2.40 | length 1085.1
  Top Layer w10: P2.40 180,2300 v1(340,2300) ; v1(935,1885) 937.3,1882.7 955.01,1882.7 1.5
  Bottom Layer w10: v1@340,2305 395,2305 815,1885 v1(935,1885)
PE7: 1.38 P2.22 | length 907.4
  Top Layer w10: P2.22 169.15,1500 350.71,1500 607.14,1243.57 828.57,1243.57 1.38
PE8: 1.39 P2.21 | length 795.2
  Top Layer w10: P2.21 354.57,1455.43 586.36,1223.64 836.48,1223.64 1.39
PE9: 1.40 P2.20 | length 929.5
  Top Layer w10: P2.20 182.57,1413.43 351.57,1413.43 565,1200 840.68,1200 1.40
PE10: 1.41 P2.19 | length 806.2
  Top Layer w10: P2.19 379.57,1355.43 555,1180 848.52,1180 1.41
PE11: 1.42 P2.18 | length 930.5
  Top Layer w10: P2.18 174.15,1305 390,1305 534.95,1160.05 855.13,1160.05 938.65,1243.57 1.42
PE12: 1.43 P2.17 | length 814.2
  Top Layer w10: P2.17 226.07,1255.43 257.85,1223.64 431.36,1223.64 515,1140 864.19,1140 1.43
PE13: 1.44 P2.16 | length 934.4
  Top Layer w10: P2.16 169.15,1200 405,1200 485,1120 872.03,1120 1.44
PE14: 1.45 P2.15 | length 822.2
  Top Layer w10: P2.15 255,1125 417.47,1125 442.47,1100 879.87,1100 1.45
PE15: 1.46 P2.14 | length 946.6
  Top Layer w10: P2.14 174.15,1105 378.47,1105 403.47,1080 886.43,1080 994.32,1187.89 1.46
RST: 1.14 C1.2 RESET1.1 | length 2303.4
  Top Layer w10: 1.14 931.74,1655.43 v1(930,1655.43) ; RESET1.1 1047.58,285 C1.2 860,285 860,335 1165,335 v1(1170,340)
  Bottom Layer w10: v1(930,1655.43) 930,1685.86 984.14,1740 1010,1740 1225,1525 1225,660 1170,605 v1(1170,340)
VBTA: 1.6
VDDA: 1.22 C9.2 P2.7 R2.1 R3.1 | length 1394.6
  Top Layer w10: R2.1 607.49,1779.49 C9.2 608,1719.55 R3.1 639.15,1630 733.17,1630 757.69,1605.48 1.22 758.97,1604.2 786.81,1576.36 786.81,1561.43 795,1553.25 v1(795,1550)
  Bottom Layer w10: P2.7 320,850.85 320,1075 v1(795,1550)
VREF+: 1.21 P2.8 R3.2 | length 1449.9
  Top Layer w10: R3.2 731.2,1661.09 1.21 812.36,1579.93 812.36,1572.97 v1(814.65,1570.68)
  Bottom Layer w10: P2.8 165,715 205.6,715 207.18,713.42 273.43,713.42 345,785 345,1055 825,1535 825,1560.33 v1(814.65,1570.68)
pads on no net: J2. J2.4
copper on no net: | length 2536.2
  Top Layer w10: 2379.15,36.66 2398.96,-23.4 ; 2388.76,2941.67 2408.96,3001.6 ; 2388.96,-23.37 2408.96,-23.43 ; 2398.96,3001.63 2418.96,3001.57 ; 2402.66,1098.22 2398.96,-23.4 ; 2405.25,1879.98 2408.96,3001.6 ; 2419.15,36.53 2398.96,-23.4 ; 2428.76,2941.53 2408.96,3001.6

## Other copper
Top Layer:
  text "3025.017 (mil)" at 2438.69,1108.1 h18 r89.81

## Silkscreen, mask and mechanical layers (free items; w line width, h text height)
Top Overlay:
  text "CLK" at 1120,2795 h18
  text "DIO" at 1215,2795 h18
  text "GND" at 1317.94,2795 h18
  text "3V3" at 1420,2795 h18
  text "PE0" at 1620,2610 h18
  text "PE1" at 1730,2610 h18
  text "PE2" at 302.5,2552 h18
  text "PE3" at 395,2552 h18
  text "PE8" at 1620,2510.28 h18
  text "PE9" at 1730,2509.76 h18
  text "PE4" at 302.5,2454 h18
  text "PE5" at 395,2454 h18
  text "PB6" at 1620,2410.56 h18
  text "PB7" at 1730,2409.52 h18
  text "PE6" at 302.5,2356 h18
  text "PC15" at 395,2356 h18
  text "PB3" at 1620,2310.83 h18
  text "PB5" at 1730,2309.28 h18
  text "PC0" at 302.5,2258 h18
  text "PC1" at 395,2258 h18
  text "PD6" at 1620,2211.11 h18
  text "PD7" at 1730,2209.05 h18
  text "PC2" at 302.5,2160 h18
  text "PC3" at 395,2160 h18
  text "PD4" at 1620,2111.39 h18
  text "PD5" at 1730,2108.81 h18
  text "PA0" at 300,2090 h18
  text "PA1" at 300,2026.67 h18
  text "PD2" at 1620,2011.67 h18
  text "PD3" at 1730,2008.57 h18
  text "PA2" at 300,1963.33 h18
  text "PD0" at 1620,1911.94 h18
  text "PD1" at 1730,1908.33 h18
  text "PA3" at 300,1900 h18
  text "PA4" at 302.5,1850 h18
  text "PA5" at 400,1845 h18
  text "PC11" at 1620,1812.22 h18
  text "PC12" at 1730,1808.09 h18
  text "PA6" at 300,1750.42 h18
  text "PA7" at 400,1745.36 h18
  text "PA15" at 1620,1712.5 h18
  text "PC10" at 1730,1707.86 h18
  text "PC4" at 300,1650.39 h18
  text "PC5" at 400,1645.71 h18
  text "PA11" at 1620,1612.78 h18
  text "PA12" at 1730,1607.62 h18
  text "PB0" at 300,1550.36 h18
  text "PB1" at 400,1546.07 h18
  text "PA9" at 1620,1513.06 h18
  text "PA10" at 1730,1507.38 h18
  text "PE7" at 300,1450.33 h18
  text "PE8" at 400,1446.43 h18
  text "PA8" at 1730,1407.14 h18
  text "PC9" at 1635,1400 h18
  text "PE9" at 300,1350.29 h18
  text "PE10" at 400,1346.79 h18
  text "PC7" at 1620,1313.61 h18
  text "PC8" at 1730,1306.9 h18
  text "PE11" at 300,1250.26 h18
  text "PE12" at 400,1247.14 h18
  text "PD15" at 1620,1213.89 h18
  text "PC6" at 1730,1206.67 h18
  text "PE13" at 300,1150.23 h18
  text "PE14" at 400,1147.5 h18
  text "PD12" at 1620,1114.17 h18
  text "PD14" at 1730,1106.43 h18
  text "PE15" at 300,1050.2 h18
  text "PB10" at 400,1047.86 h18
  text "PD11" at 1620,1014.44 h18
  text "PD12" at 1730,1006.19 h18
  text "PB11" at 300,950.16 h18
  text "PB12" at 400,948.21 h18
  text "PD9" at 1620,914.72 h18
  text "PD10" at 1730,905.95 h18
  text "PB13" at 300,850.13 h18
  text "PB14" at 400,848.57 h18
  text "PB15" at 1620,815 h18
  text "PD8" at 1730,805.71 h18
  text "VRE" at 300,750.1 h18
  text "VDD" at 400,748.93 h18
  text "GND" at 1600,705 h18
  text "GND" at 1730,705.48 h18
  text "GND" at 300,650.07 h18
  text "GND" at 400,649.29 h18
  text "3V3" at 1600,605 h18
  text "3V3" at 1730,605.24 h18
  text "GND" at 300,550.03 h18
  text "GND" at 400,549.64 h18
  text "5V" at 1600,505 h18
  text "5V" at 1730,505 h18
  text "3V3" at 300,450 h18
  text "3V3" at 400,450 h18
Mechanical 13:
  lines w10: -5,5 ccw(c-7.5,7.5) -5,10 ; 124.58,3020 ccw(c134.79,3010.21) 125,3000
  lines w30: -5,-10 2075,-10 2075,3010 -5,3010 -5,-10

## Dimensions
-30,-170 to 2075,-10 on Top Layer
-5,-10 to -20,-175 on Top Layer